# Altium PCB PCB1.PcbDoc
Units mil, origin at the board's own origin, x right, y up, seen from the top; angles counter-clockwise.
Board outline 6000 x 4000 mil, 2 copper layers (Top Layer, Bottom Layer); 4 components, 9 nets, 219 pads, 0 vias.
Unrouted connection lines stored in the file: 19.
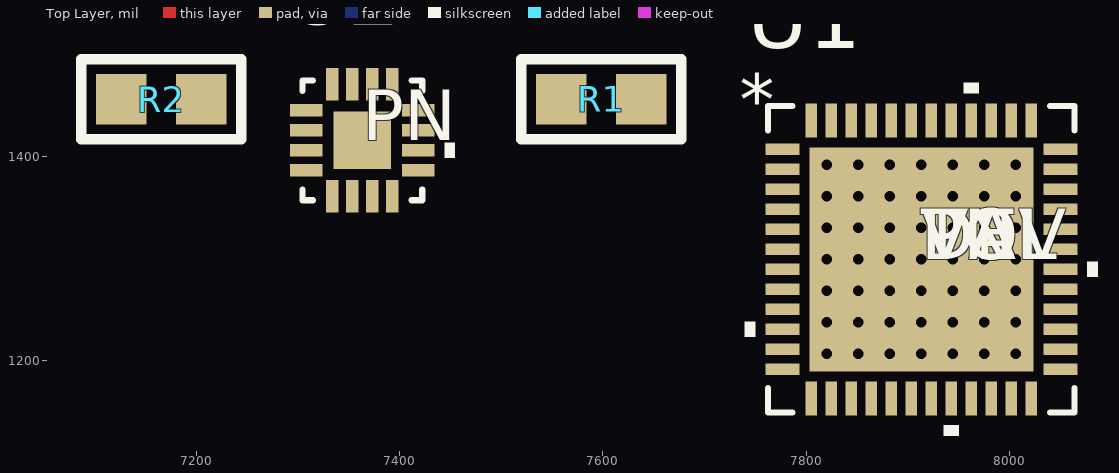
[diagram p0: Top Layer view]
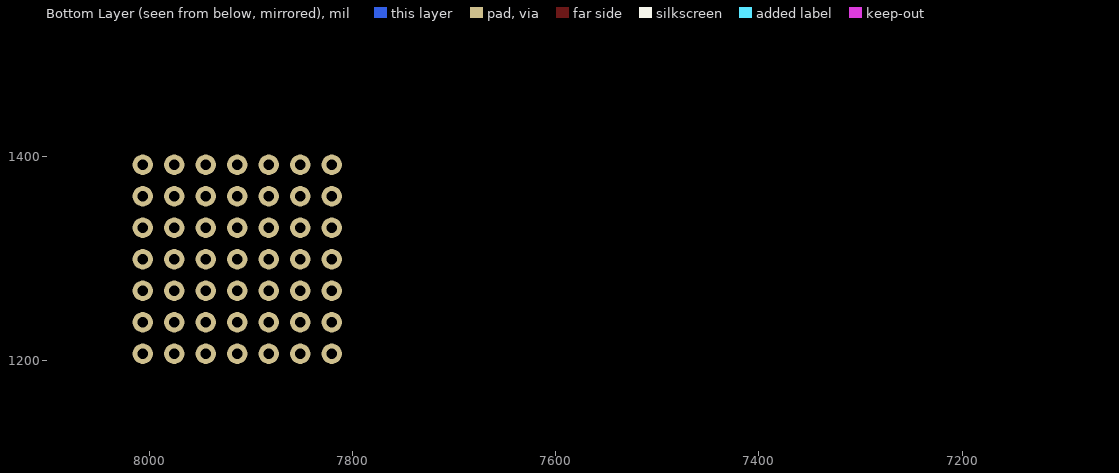
[diagram p1: Bottom Layer view, seen from below]

## Layer stack, top to bottom
Top Solder: solder mask 0.4, Solder Resist, Dk 3.5
Top Layer: signal copper 1.4
Dielectric 1: dielectric 12.6, FR-4, Dk 4.8
Bottom Layer: signal copper 1.4
Bottom Solder: solder mask 0.4, Solder Resist, Dk 3.5

## Board outline
1000,1000 7000,1000 7000,5000 1000,5000

## Design rules (kind name [scope] priority, off if disabled: settings)
Clearance [All] p1: gap=10
PolygonConnect [All] p1: connectstyle=Relief reliefconductorwidth=10 reliefentries=4 polygonreliefangle="90 Angle" airgapwidth=10
RoomDefinition Sheet1 [InComponentClass('Sheet1')] p1: confinementstyle=ConfineIn formatcopy=TRUE lockcomponents=FALSE outline 7047.25,1102.36 8110.24,1102.36 8110.24,1614.17 7047.25,1614.17
RoutingVias [All] p1: holewidth=28 width=50 viastyle="Through Hole" minholewidth=28 minwidth=50 maxholewidth=28 maxwidth=50
SolderMaskExpansion [All] p1: expansion=4
Width [All] p1: maxlimit=10 minlimit=10 preferedwidth=10
29 further rules are at their usual default settings.

## Components (designator, comment, footprint, x,y, rotation, side; value= is the part's Value field where it differs from the comment)
R1 "Resistor" Resistor 7559.06,1456.69 r0 top
R2 "Resistor" Resistor 7125.99,1456.69 r0 top
U1 "ADC" ADC 7913.39,1299.21 r0 top
U2 "ADA4932" AD 7362.21,1417.32 r0 top

## Footprints (in the part's own frame and the unit in brackets; to place one, negate y for a bottom-side part, rotate by r counter-clockwise, add the part's x,y. Pads: shape width x height; smd on the part's side, far side on the other; paste and mask are expansions set on the pad)
AD [mil]
  rect 32x12 smd mask+5: 1(-54,28.53) 2(-54,8.84) 3(-54,-10.84) 4(-54,-30.53) 9(56,-30.53) 10(56,-10.84) 11(56,8.84) 12(56,28.53)
  rect 12x32 smd mask+5: 5(-28.53,-56) 6(-8.84,-56) 7(10.84,-56) 8(30.53,-56) 13(30.53,54) 14(10.84,54) 15(-8.84,54) 16(-28.53,54)
  rect 57x57 smd mask-28: 17(1,-1)
  silkscreen extent -58,-60 92,58, body extent 1,-1 1,-1
ADC [mil]
  rect 33.46x11.02 smd paste-5.51: 1(-136.81,108.27) 1(-136.81,108.27) 2(-136.81,88.58) 2(-136.81,88.58) 3(-136.81,68.9) 3(-136.81,68.9) 4(-136.81,49.21) 4(-136.81,49.21) 5(-136.81,29.53) 5(-136.81,29.53) 6(-136.81,9.84) 6(-136.81,9.84) 7(-136.81,-9.84) 7(-136.81,-9.84) 8(-136.81,-29.53) 8(-136.81,-29.53) 9(-136.81,-49.21) 9(-136.81,-49.21) 10(-136.81,-68.9) 10(-136.81,-68.9) 11(-136.81,-88.58) 11(-136.81,-88.58) 12(-136.81,-108.27) 12(-136.81,-108.27) 25(136.81,-108.27) 25(136.81,-108.27) 26(136.81,-88.58) 26(136.81,-88.58) 27(136.81,-68.9) 27(136.81,-68.9) 28(136.81,-49.21) 28(136.81,-49.21) 29(136.81,-29.53) 29(136.81,-29.53) 30(136.81,-9.84) 30(136.81,-9.84) 31(136.81,9.84) 31(136.81,9.84) 32(136.81,29.53) 32(136.81,29.53) 33(136.81,49.21) 33(136.81,49.21) 34(136.81,68.9) 34(136.81,68.9) 35(136.81,88.58) 35(136.81,88.58) 36(136.81,108.27) 36(136.81,108.27)
  rect 11.02x33.46 smd paste-5.51: 13(-108.3,-136.81) 13(-108.3,-136.81) 14(-88.6,-136.81) 14(-88.6,-136.81) 15(-68.91,-136.81) 15(-68.91,-136.81) 16(-49.22,-136.81) 16(-49.22,-136.81) 17(-29.53,-136.81) 17(-29.53,-136.81) 18(-9.84,-136.81) 18(-9.84,-136.81) 19(9.85,-136.81) 19(9.85,-136.81) 20(29.54,-136.81) 20(29.54,-136.81) 21(49.23,-136.81) 21(49.23,-136.81) 22(68.91,-136.81) 22(68.91,-136.81) 23(88.61,-136.81) 23(88.61,-136.81) 24(108.3,-136.81) 24(108.3,-136.81) 37(108.3,136.81) 37(108.3,136.81) 38(88.61,136.81) 38(88.61,136.81) 39(68.91,136.81) 39(68.91,136.81) 40(49.23,136.81) 40(49.23,136.81) 41(29.54,136.81) 41(29.54,136.81) 42(9.85,136.81) 42(9.85,136.81) 43(-9.84,136.81) 43(-9.84,136.81) 44(-29.53,136.81) 44(-29.53,136.81) 45(-49.22,136.81) 45(-49.22,136.81) 46(-68.91,136.81) 46(-68.91,136.81) 47(-88.6,136.81) 47(-88.6,136.81) 48(-108.3,136.81) 48(-108.3,136.81)
  rect 220.47x220.47 smd paste-109.74 mask-109.5: 49(0,0) 49(0,0)
  round 20 / inner round 60 / far side round 20 hole 10: V(-93,-93) V(-93,-93) V(-93,-62) V(-93,-62) V(-93,-31) V(-93,-31) V(-93,0) V(-93,0) V(-93,31) V(-93,31) V(-93,62) V(-93,62) V(-93,93) V(-93,93) V(-62,-93) V(-62,-93) V(-62,-62) V(-62,-62) V(-62,-31) V(-62,-31) V(-62,0) V(-62,0) V(-62,31) V(-62,31) V(-62,62) V(-62,62) V(-62,93) V(-62,93) V(-31,-93) V(-31,-93) V(-31,-62) V(-31,-62) V(-31,-31) V(-31,-31) V(-31,0) V(-31,0) V(-31,31) V(-31,31) V(-31,62) V(-31,62) V(-31,93) V(-31,93) V(0,-93) V(0,-93) V(0,-62) V(0,-62) V(0,-31) V(0,-31) V(0,0) V(0,0) V(0,31) V(0,31) V(0,62) V(0,62) V(0,93) V(0,93) V(31,-93) V(31,-93) V(31,-62) V(31,-62) V(31,-31) V(31,-31) V(31,0) V(31,0) V(31,31) V(31,31) V(31,62) V(31,62) V(31,93) V(31,93) V(62,-93) V(62,-93) V(62,-62) V(62,-62) V(62,-31) V(62,-31) V(62,0) V(62,0) V(62,31) V(62,31) V(62,62) V(62,62) V(62,93) V(62,93) V(93,-93) V(93,-93) V(93,-62) V(93,-62) V(93,-31) V(93,-31) V(93,0) V(93,0) V(93,31) V(93,31) V(93,62) V(93,62) V(93,93) V(93,93)
  silkscreen extent -174,-174 174,174, body extent 0,0 0,0
Resistor [mm]
  rect 1.27x1.27 smd: 1(0,0) 1(0,0) 2(2,0)
  silkscreen extent -1,-1 3,1

## Nets (pads, with @x,y where several pads share a name; then routed paths per layer and width w, separated by ;. In a path a pad name is that pad's centre, name@x,y a point inside that pad or via, vN(x,y) a via of type N, cw(c..) or ccw(c..) an arc to the next point about the centre after c; other vN are vias at no path point)
1.8V: U1.2 U1.35
3.3V: U1.8 U1.18 U1.20 U1.22 U1.24 U1.26
+5V: U2.5
-5V: U2.13
GND: U1.1 U1.9 U1.12 U1.14 U1.17 U1.19 U1.25 U1.36 U2.3
NetC1_1: R1.1 R2.2 U2.2
NetR1_2: R1.2 U1.15 U2.11
NetR2_1: R2.1
NetU1_16: U1.16 U2.10
pads on no net: U1.3 U1.4 U1.5 U1.6 U1.7 U1.10 U1.11 U1.13 U1.21 U1.23 U1.27 U1.28 U1.29 U1.30 U1.31 U1.32 U1.33 U1.34 U1.37 U1.38 U1.39 U1.40 U1.41 U1.42 U1.43 U1.44 U1.45 U1.46 U1.47 U1.48 U1.49 U1.V U2.1 U2.4 U2.6 U2.7 U2.8 U2.9 U2.12 U2.14 U2.15 U2.16 U2.17

## Text inside footprints (layer, text, board x,y; h text height)
U1: Top Overlay "*" at 7734.85,1432.32 h50; Top Overlay "PN" at 7913.39,1299.21 h50; Top Overlay "DEV" at 7913.39,1299.21 h50; Top Overlay "VAL" at 7913.39,1299.21 h50; Top Overlay "TOL" at 7913.39,1299.21 h50; Top Overlay "*" at 7734.85,1432.32 h50; Top Overlay "PN" at 7913.39,1299.21 h50; Top Overlay "DEV" at 7913.39,1299.21 h50; Top Overlay "VAL" at 7913.39,1299.21 h50; Top Overlay "TOL" at 7913.39,1299.21 h50; Mechanical 13 "*" at 7734.85,1432.32 h50; Mechanical 13 "*" at 7734.85,1432.32 h50
U2: Top Overlay "PN" at 7363.21,1416.32 h50